# EAGLE board cs5361_breakout (EAGLE 6.5.0)
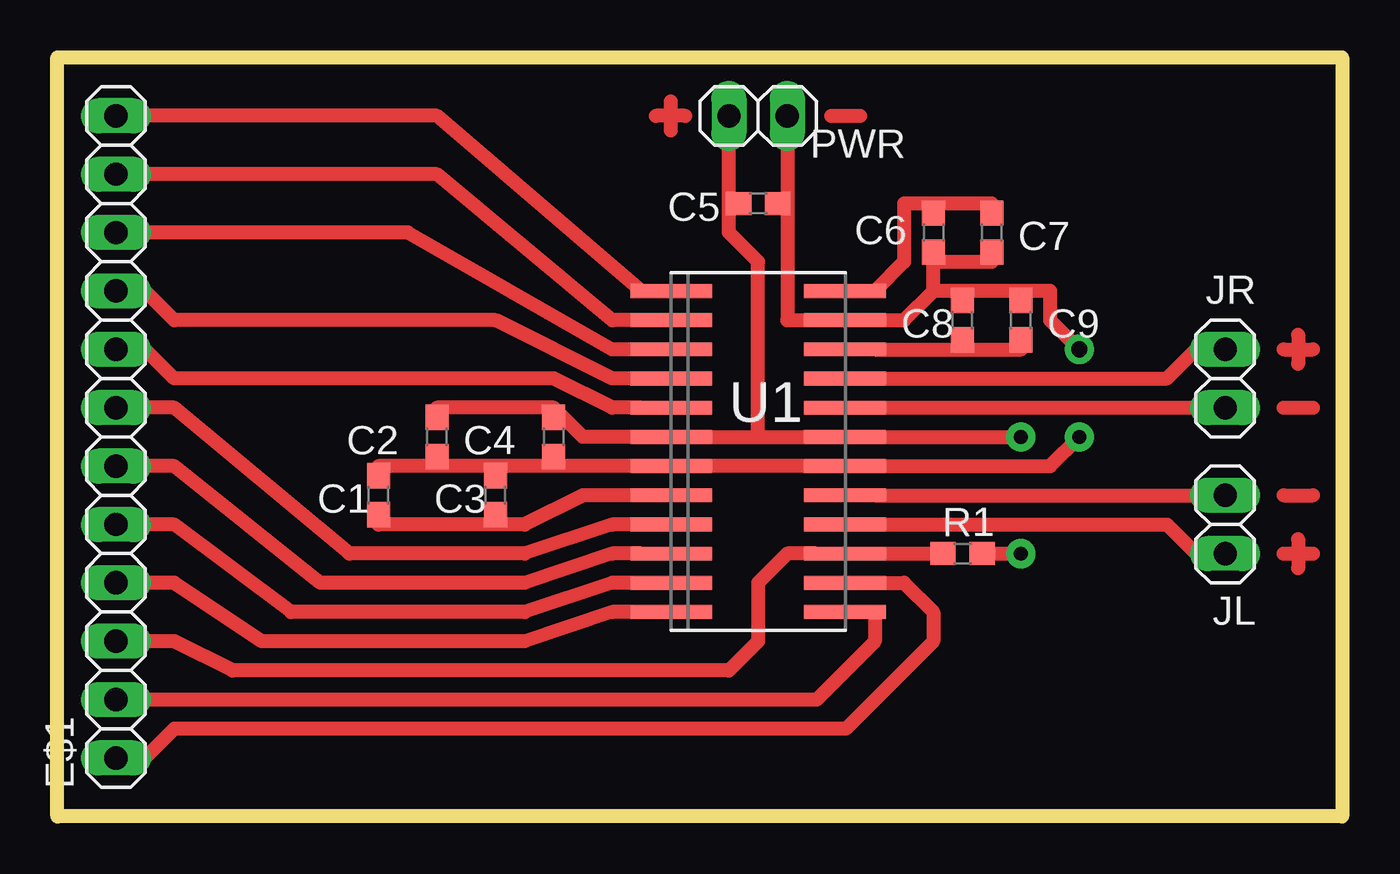
[diagram p0: board, top side]

Size 55.88 x 33.02 mm. Coordinates in mm from the lower left corner, seen from the top.
Outline: 0,0 0,33.02 55.88,33.02 55.88,0 0,0
Copper layers (1*16): Top 0.035mm / dielectric 1.5mm / Bottom 0.035mm
Design rules "default": minimum track width 10mil, minimum drill 24mil, track to track 8mil, track to pad 8mil, pad to pad 8mil, via to via 8mil, smd to smd 8mil, copper to edge 40mil, drill to drill 8mil, minimum pad ring 10mil, minimum via ring 8mil, stop-mask expansion 4mil, vias tented up to drill 0mil, thermal gap 10mil

## Footprints (pad centres in the part's own frame; a part is rotated, then mirrored left to right if it is on the bottom)
C0603 = smd 1.1 x 1: 1 -0.85,0; 2 0.85,0
1X12 = drill 1.016 long: 1 -13.97,0; 2 -11.43,0; 3 -8.89,0; 4 -6.35,0; 5 -3.81,0; 6 -1.27,0; 7 1.27,0; 8 3.81,0; 9 6.35,0; 10 8.89,0; 11 11.43,0; 12 13.97,0
1X02 = drill 1.016 long: 1 -1.27,0; 2 1.27,0
SOIC-24NW = smd 0.6 x 3.56: P1 -6.985,-3.78; P2 -5.715,-3.78; P3 -4.445,-3.78; P4 -3.175,-3.78; P5 -1.905,-3.78; P6 -0.635,-3.78; P7 0.635,-3.78; P8 1.905,-3.78; P9 3.175,-3.78; P10 4.445,-3.78; P11 5.715,-3.78; P12 6.985,-3.78; P13 6.985,3.78; P14 5.715,3.78; P15 4.445,3.78; P16 3.175,3.78; P17 1.905,3.78; P18 0.635,3.78; P19 -0.635,3.78; P20 -1.905,3.78; P21 -3.175,3.78; P22 -4.445,3.78; P23 -5.715,3.78; P24 -6.985,3.78

## Placement (x,y rotation side)
C1  1uF  [C0603]  13.97,13.97 90 top
C2  1uF  [C0603]  16.51,16.51 90 top
C3  .1uF  [C0603]  19.05,13.97 90 top
C4  .1uF  [C0603]  21.59,16.51 90 top
C5  1uF  [C0603]  30.48,26.67 180 top
C6  1uF  [C0603]  38.1,25.4 270 top
C7  .1uF  [C0603]  40.64,25.4 90 top
C8  1uF  [C0603]  39.37,21.59 90 top
C9  .1uF  [C0603]  41.91,21.59 90 top
E$1  [1X12]  2.54,16.51 90 top
JL  [1X02]  50.8,12.7 90 top
JR  [1X02]  50.8,19.05 90 top
PWR  [1X02]  30.48,30.48 180 top
R1  10k  [C0603]  39.37,11.43 0 top
U1  [SOIC-24NW]  30.48,15.88 270 top

## Library data of the parts
C1-C9 R1 = resistor
E$1 JL JR PWR = pinhead
U1 = dp_devices

## Nets
S$2: PWR.2
S$6: JR.1
S$11: JR.2
S$12: JL.2
S$13: JL.1
S$25: PWR.1

## Tracks (layer width: path | path; a pad name or v marks a point on that pad's centre or on a via)
S$1
  Top 0.61: 33.02,15.24 27.94,15.24
S$2
  Top 0.61: 27.94,16.51 30.48,16.51 | 30.48,16.51 33.02,16.51 | 30.48,16.51 30.48,24.13 29.21,25.4 PWR.2
S$3
  Top 0.61: 40.64,26.67 36.83,26.67 36.83,24.13 35.56,22.86
S$4
  Top 0.61: 25.4,17.78 24.13,17.78 21.59,19.05 5.08,19.05 3.81,20.32 2.54,20.32
S$5
  Top 0.61: 35.56,20.32 41.91,20.32
S$6
  Top 0.61: 35.56,17.78 JR.1
S$7
  Top 0.61: 25.4,12.7 24.13,12.7 20.32,11.43 12.7,11.43 5.08,17.78 2.54,17.78
S$8
  Top 0.61: 25.4,15.24 13.97,15.24
S$9
  Top 0.61: 25.4,13.97 22.86,13.97 20.32,12.7 13.97,12.7
S$10
  Top 0.61: 25.4,16.51 22.86,16.51 21.59,17.78 16.51,17.78
S$11
  Top 0.61: 35.56,19.05 48.26,19.05 49.53,20.32 JR.2
S$12
  Top 0.61: 35.56,13.97 JL.2
S$13
  Top 0.61: 35.56,12.7 48.26,12.7 49.53,11.43 JL.1
S$14  (via drill 0.6 pad 1.27)
  Top 0.61: 35.56,16.51 v41.91,16.51
S$15
  Top 0.61: 25.4,19.05 24.13,19.05 19.05,21.59 5.08,21.59 3.81,22.86 2.54,22.86
S$16
  Top 0.61: 25.4,20.32 24.13,20.32 15.24,25.4 2.54,25.4
S$17
  Top 0.61: 25.4,21.59 24.13,21.59 16.51,27.94 2.54,27.94
S$18
  Top 0.61: 25.4,22.86 16.51,30.48 2.54,30.48
S$19
  Top 0.61: 25.4,11.43 24.13,11.43 20.32,10.16 11.43,10.16 5.08,15.24 2.54,15.24
S$20
  Top 0.61: 25.4,10.16 24.13,10.16 20.32,8.89 10.16,8.89 5.08,12.7 2.54,12.7
S$21
  Top 0.61: 25.4,8.89 24.13,8.89 20.32,7.62 8.89,7.62 5.08,10.16 2.54,10.16
S$22
  Top 0.61: 33.02,11.43 31.75,11.43 30.48,10.16 30.48,7.62 29.21,6.35 7.62,6.35 5.08,7.62 2.54,7.62
S$23
  Top 0.61: 35.56,8.89 35.56,7.62 33.02,5.08 2.54,5.08
S$24
  Top 0.61: 35.56,10.16 36.83,10.16 38.1,8.89 38.1,7.62 34.29,3.81 5.08,3.81 3.81,2.54 2.54,2.54
S$25  (via drill 0.7 pad 1.27)
  Top 0.61: PWR.1 31.75,21.59 36.83,21.59 38.1,22.86 | 38.1,22.86 43.18,22.86 43.18,21.59 v44.45,20.32 | 38.1,22.86 38.1,24.13 40.64,24.13
S$26  (via drill 0.6 pad 1.27)
  Top 0.61: 40.64,11.43 v41.91,11.43
S$27  (via drill 0.6 pad 1.27)
  Top 0.61: 35.56,15.24 43.18,15.24 v44.45,16.51
S$28
  Top 0.61: 35.56,11.43 38.1,11.43
S$29
  Top 0.61: 27.3,30.48 26.04,30.48
S$30
  Top 0.61: 26.67,31.11 26.67,29.84
S$31
  Top 0.61: 33.66,30.48 34.92,30.48
S$32
  Top 0.61: 53.34,20.32 54.61,20.32
S$33
  Top 0.61: 53.98,20.95 53.98,19.68
S$34
  Top 0.61: 53.34,17.78 54.61,17.78
S$35
  Top 0.61: 53.34,13.97 54.61,13.97
S$36
  Top 0.61: 53.34,11.43 54.61,11.43
S$37
  Top 0.61: 53.98,12.06 53.98,10.79